# EAGLE board user_prog_jig_pcb_v206 (EAGLE 9.7.0)
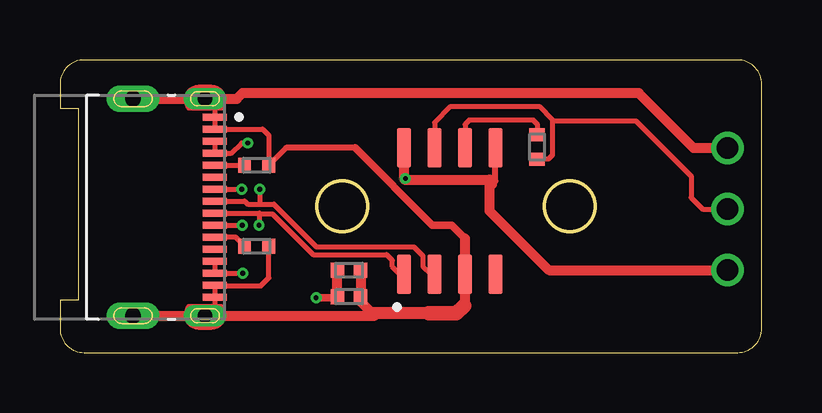
[diagram p0: board, top side]
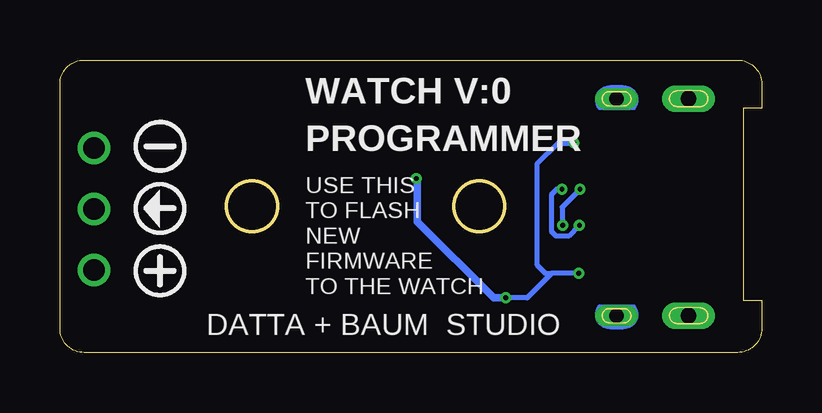
[diagram p1: board, bottom side, seen from below]

Size 29.24 x 12.19 mm. Coordinates in mm from the lower left corner, seen from the top.
Outline: 2.57,10.25 2.54,10.25 2.51,10.26 2.49,10.26 2.46,10.27 2.43,10.28 2.41,10.3 2.38,10.31 2.36,10.33 2.34,10.35 2.32,10.37 2.3,10.39 2.29,10.41 2.27,10.44 2.27,10.47 2.26,10.49 2.25,10.52 2.25,10.55 2.25,10.58 2.25,10.6 2.25,10.63 2.26,10.66 2.27,10.69 2.27,10.71 2.29,10.74 2.3,10.76 2.32,10.79 2.34,10.81 2.36,10.83 2.38,10.84 2.41,10.86 2.43,10.87 2.46,10.88 2.49,10.89 2.51,10.9 2.54,10.9 2.57,10.9 3.52,10.9 3.55,10.9 3.58,10.9 3.6,10.89 3.63,10.88 3.66,10.87 3.68,10.86 3.71,10.84 3.73,10.83 3.75,10.81 3.77,10.79 3.79,10.76 3.8,10.74 3.82,10.71 3.83,10.69 3.83,10.66 3.84,10.63 3.84,10.6 3.84,10.58 3.84,10.55 3.84,10.52 3.83,10.49 3.83,10.47 3.82,10.44 3.8,10.41 3.79,10.39 3.77,10.37 3.75,10.35 3.73,10.33 3.71,10.31 3.68,10.3 3.66,10.28 3.63,10.27 3.6,10.26 3.58,10.26 3.55,10.25 3.52,10.25 2.57,10.25
Outline: 5.75,10.28 5.72,10.28 5.69,10.28 5.67,10.29 5.64,10.29 5.62,10.3 5.59,10.32 5.57,10.33 5.55,10.35 5.53,10.36 5.51,10.38 5.5,10.4 5.48,10.43 5.47,10.45 5.46,10.47 5.46,10.5 5.45,10.52 5.45,10.55 5.45,10.58 5.45,10.6 5.45,10.63 5.46,10.65 5.46,10.68 5.47,10.7 5.48,10.73 5.5,10.75 5.51,10.77 5.53,10.79 5.55,10.81 5.57,10.82 5.59,10.84 5.62,10.85 5.64,10.86 5.67,10.87 5.69,10.87 5.72,10.88 5.75,10.88 6.34,10.88 6.37,10.88 6.4,10.87 6.42,10.87 6.45,10.86 6.47,10.85 6.5,10.84 6.52,10.82 6.54,10.81 6.56,10.79 6.58,10.77 6.59,10.75 6.6,10.73 6.62,10.7 6.63,10.68 6.63,10.65 6.64,10.63 6.64,10.6 6.64,10.58 6.64,10.55 6.64,10.52 6.63,10.5 6.63,10.47 6.62,10.45 6.6,10.43 6.59,10.4 6.58,10.38 6.56,10.36 6.54,10.35 6.52,10.33 6.5,10.32 6.47,10.3 6.45,10.29 6.42,10.29 6.4,10.28 6.37,10.28 6.34,10.28 5.75,10.28
Outline: 2.57,1.21 2.54,1.21 2.51,1.22 2.49,1.22 2.46,1.23 2.43,1.24 2.41,1.26 2.38,1.27 2.36,1.29 2.34,1.31 2.32,1.33 2.3,1.35 2.29,1.37 2.27,1.4 2.27,1.43 2.26,1.45 2.25,1.48 2.25,1.51 2.25,1.54 2.25,1.56 2.25,1.59 2.26,1.62 2.27,1.65 2.27,1.67 2.29,1.7 2.3,1.72 2.32,1.75 2.34,1.77 2.36,1.79 2.38,1.8 2.41,1.82 2.43,1.83 2.46,1.84 2.49,1.85 2.51,1.86 2.54,1.86 2.57,1.86 3.52,1.86 3.55,1.86 3.58,1.86 3.6,1.85 3.63,1.84 3.66,1.83 3.68,1.82 3.71,1.8 3.73,1.79 3.75,1.77 3.77,1.75 3.79,1.72 3.8,1.7 3.82,1.67 3.83,1.65 3.83,1.62 3.84,1.59 3.84,1.56 3.84,1.54 3.84,1.51 3.84,1.48 3.83,1.45 3.83,1.43 3.82,1.4 3.8,1.37 3.79,1.35 3.77,1.33 3.75,1.31 3.73,1.29 3.71,1.27 3.68,1.26 3.66,1.24 3.63,1.23 3.6,1.22 3.58,1.22 3.55,1.21 3.52,1.21 2.57,1.21
Outline: 5.75,1.24 5.72,1.24 5.69,1.24 5.67,1.25 5.64,1.25 5.62,1.26 5.59,1.28 5.57,1.29 5.55,1.31 5.53,1.32 5.51,1.34 5.5,1.36 5.48,1.39 5.47,1.41 5.46,1.43 5.46,1.46 5.45,1.48 5.45,1.51 5.45,1.54 5.45,1.56 5.45,1.59 5.46,1.61 5.46,1.64 5.47,1.66 5.48,1.69 5.5,1.71 5.51,1.73 5.53,1.75 5.55,1.77 5.57,1.78 5.59,1.8 5.62,1.81 5.64,1.82 5.67,1.83 5.69,1.83 5.72,1.84 5.75,1.84 6.34,1.84 6.37,1.84 6.4,1.83 6.42,1.83 6.45,1.82 6.47,1.81 6.5,1.8 6.52,1.78 6.54,1.77 6.56,1.75 6.58,1.73 6.59,1.71 6.6,1.69 6.62,1.66 6.63,1.64 6.63,1.61 6.64,1.59 6.64,1.56 6.64,1.54 6.64,1.51 6.64,1.48 6.63,1.46 6.63,1.43 6.62,1.41 6.6,1.39 6.59,1.36 6.58,1.34 6.56,1.32 6.54,1.31 6.52,1.29 6.5,1.28 6.47,1.26 6.45,1.25 6.42,1.25 6.4,1.24 6.37,1.24 6.34,1.24 5.75,1.24
Outline: 0,2.17 0,1 arc90 1,0 28.24,0 arc90 29.24,1 29.24,11.19 arc90 28.24,12.19 1,12.19 arc90 0,11.19 0,10.19 0.77,10.19 0.77,2.17 0,2.17
Outline: circle at 21.24,6.1 radius 1.05
Outline: circle at 11.77,6.1 radius 1.05
Copper layers (1*16): Top / Bottom
Stack-up Default Layer Stack: Top User Defined 0.035mm / Dielectric-1 User Defined 1.5mm / Bottom User Defined 0.035mm
Design rules "SparkFun-2-Layer-Minimum-JLCPCB *": minimum track width 5mil, minimum drill 0.2mm, track to track 5mil, track to pad 5mil, pad to pad 5mil, via to via 5mil, smd to smd 5mil, copper to edge 7mil, drill to drill 7mil, minimum pad ring 5mil, minimum via ring 5mil, stop-mask expansion 2.5mil, vias tented up to drill 0.2mm, thermal gap 10mil

## Footprints (pad centres in the part's own frame; a part is rotated, then mirrored left to right if it is on the bottom)
CAPC1005X60 = smd 0.56 x 0.629: 1 -0.485,0; 2 0.485,0
MOLEX_2130830005 = smd 0.3 x 1: A1 -3.75,0; A4 -2.75,0; A5 -1.75,0; A6 -0.75,0; A7 0.75,0; A8 1.75,0; A9 2.75,0; A12 3.75,0; B1 3.25,0; B4 2.25,0; B5 1.25,0; B6 0.25,0; B7 -0.25,0; B8 -1.25,0; B9 -2.25,0; B12 -3.25,0 | drill 0.6 pad 0.8 long: SH1 -4.52,-0.4; SH4 4.52,-0.4 | drill 0.65 pad 1.1 long: SH2 -4.52,-3.4; SH3 4.52,-3.4
RESC1005X40 = smd 0.535 x 0.644: 1 -0.507,0; 2 0.507,0
1X3_POGO_PIN_HOLDER = drill 0.9: P$1 -2.54,0; P$2 0,0; P$3 2.54,0
CH330N = smd 1.64 x 0.59: D_N -2.635,0.635; D_P -2.635,1.905; GND -2.635,-0.635; RTS# -2.635,-1.905; RXI 2.635,0.635; TXD 2.635,-0.635; V3 2.635,1.905; VCC 2.635,-1.905

## Placement (x,y rotation side)
C3  100nF  [CAPC1005X60]  12.04,3.43 0 top
C4  100nF  [CAPC1005X60]  12.04,2.33 0 top
J1  MOLEX_USB-C-2130830005  [MOLEX_2130830005]  6.44,6.06 270 top
R1  4.7K  [RESC1005X40]  19.88,8.57 90 top
R2  5.1K  [RESC1005X40]  8.2,4.43 0 top
R3  5.1K  [RESC1005X40]  8.2,7.81 180 top
U$1  1X3_POGO_PIN_HOLDER  [1X3_POGO_PIN_HOLDER]  27.82,5.98 90 bottom
U$6  CH330N  [CH330N]  16.24,5.9 90 top

## Library data of the parts
C3 C4 = MY_CAP_LIB; CATEGORY: Capacitor
J1 = MY_CLOCK_LIB_COMPONENTS; MANUFACTURER: Molex; MAXIMUM_PACKAGE_HEIGHT: 3.36mm; PARTREV: A; STANDARD: Manufacturer recommendations
R1-R3 = resistor; CATEGORY: Resistor; SUB-CATEGORY: Fixed
U$1 U$6 = MY_CLOCK_LIB_COMPONENTS

## Nets
CC1: J1.A5 R3.2
CC2: J1.B5 R2.1
GND: C3.2 C4.2 J1.A1 J1.A12 J1.B1 J1.B12 J1.SH1 J1.SH2 J1.SH3 J1.SH4 R2.2 R3.1 U$1.P$3 U$6.GND
N$4: R1.2 U$6.TXD
UPDI_PIN: R1.1 U$1.P$2 U$6.RXI
USB_N: J1.A7 J1.B7 U$6.D_N
USB_P: J1.A6 J1.B6 U$6.D_P
V_USB: C3.1 C4.1 J1.A4 J1.A9 J1.B4 J1.B9 U$1.P$1 U$6.V3 U$6.VCC

## Tracks (layer width: path | path; a pad name or v marks a point on that pad's centre or on a via)
CC1
  Top 0.2: J1.A5 R3.2
CC2
  Top 0.2: J1.B5 7.31,4.81 R2.1
GND
  Top 0.2: J1.SH4 6.44,1.94 J1.A12 J1.B1 6.47,2.78 8.37,2.78 8.7,3.11 R2.2 | J1.SH1 6.44,10.18 J1.A1 J1.B12 8.45,9.31 8.7,9.05 R3.1 9.42,8.53
  Top 0.254: 12.3,8.53 9.42,8.53
  Top 0.305: 16.88,4.75 16.32,5.31 15.52,5.31 12.3,8.53
  Top 0.406: C3.2 C4.2 12.53,2.12 13.02,1.63 13.12,1.54 J1.SH4 J1.SH3 | 16.84,1.96 16.88,1.99 U$6.GND 16.88,4.75 | U$1.P$3 26.41,8.52 24.12,10.81 7.6,10.81 7.36,10.58 J1.SH1 J1.SH2
  Top 0.508: 15.37,1.63 13.02,1.63
  Top 0.61: 15.37,1.63 16.52,1.63 16.84,1.96
N$4
  Top 0.2: U$6.TXD 16.88,9.51 17.04,9.68 19.72,9.68 19.88,9.52 R1.2
UPDI_PIN
  Top 0.2: U$6.RXI 15.61,9.59 16.27,10.26 19.97,10.26 20.52,9.71 20.52,9.66 | 20.52,9.66 20.52,8.23 20.35,8.06 R1.1 | 20.52,9.66 23.99,9.66 26.29,7.36 26.29,6.46 26.77,5.98 U$1.P$2
USB_N  (via drill 0.2)
  Top 0.2: 8.32,6.18 8.91,6.18 10.69,4.41 14.75,4.41 15.12,4.03 15.12,3.58 15.44,3.26 U$6.D_N | J1.A7 v7.59,5.31 | v8.32,6.81 8.32,6.18 | J1.B7 7.69,6.31 7.82,6.18 8.32,6.18
  Bottom 0.2: v7.59,5.31 8.04,4.86 8.57,4.86 8.75,5.03 8.75,6.61 8.54,6.81 v8.32,6.81
USB_P  (via drill 0.2)
  Top 0.2: 8.32,5.78 8.85,5.78 10.55,4.08 13.61,4.08 13.85,3.84 13.85,3.58 14.17,3.26 U$6.D_P | J1.A6 v7.57,6.81 | 8.32,5.78 8.32,5.31 v8.29,5.31 | 8.32,5.78 8.32,5.81 J1.B6
  Bottom 0.2: v7.57,6.81 8.32,6.06 8.32,5.31 v8.29,5.31
V_USB  (via drill 0.2)
  Top 0.2: J1.B4 J1.A9 v7.62,3.31 | J1.A4 J1.B9 7.14,8.31 7.57,8.73 v7.82,8.73
  Top 0.254: 17.99,7.01 18.14,7.16 U$6.VCC
  Top 0.305: v10.67,2.28 11.51,2.28 C4.1
  Top 0.406: C4.1 C3.1 | 14.35,7.21 U$6.V3 | 14.35,7.21 17.89,7.21 17.89,6.91 | 17.99,7.01 17.89,6.91 | 17.89,6.91 17.89,5.91 20.37,3.43 U$1.P$1 | 14.35,7.21 v14.39,7.26
  Bottom 0.2: v7.62,3.31 8.75,3.31 | 8.75,3.31 9.77,2.28 v10.67,2.28 | v7.82,8.73 8.5,8.73 9.35,7.88 9.35,3.63 9.02,3.31 8.75,3.31
  Bottom 0.305: v10.67,2.28 11.17,2.28 14.35,5.46 14.35,7.21 v14.39,7.26

## Text on the board
bPlace: WATCH V:0 / PROGRAMMER | USE THIS / TO FLASH / NEW / FIRMWARE / TO THE WATCH | DATTA + BAUM STUDIO